# EAGLE board piezo-preamp-tickler_V2-RevG-Breakout (EAGLE 8.3.2)
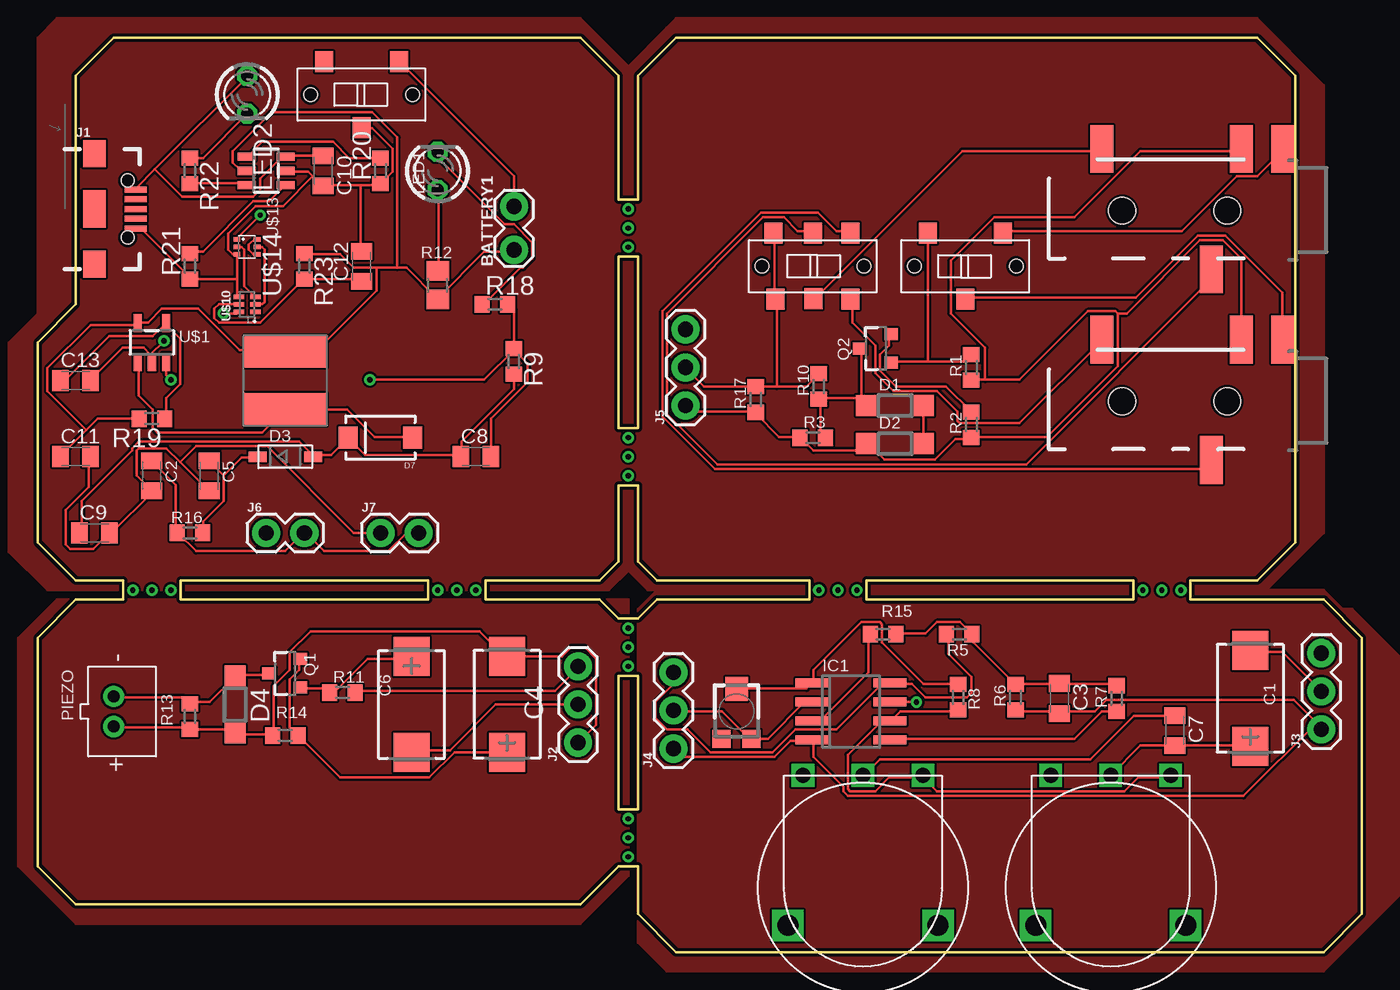
[diagram p0: board, top side]
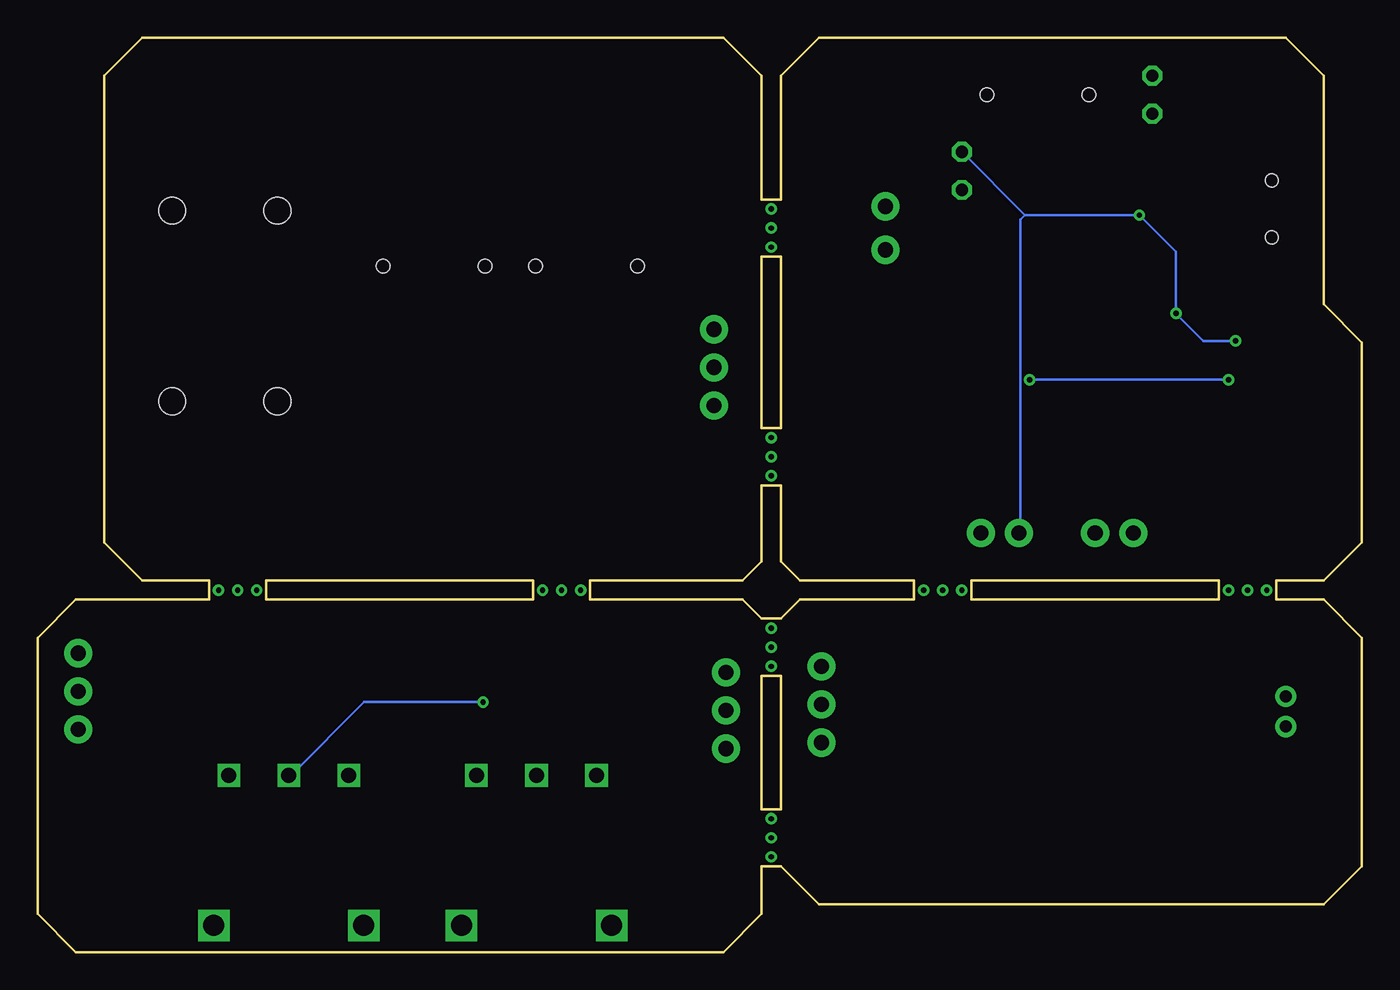
[diagram p1: board, bottom side, seen from below]

Size 88.27 x 60.96 mm. Coordinates in mm from the lower left corner, seen from the top.
Outline: 2.54,43.18 0,40.64 0,27.31 2.54,24.77 5.72,24.77 5.72,23.5 2.54,23.5 0,20.96 0,5.72 2.54,3.18 36.2,3.18 38.73,5.72 40.01,5.72 40.01,2.54 42.55,0 85.73,0 88.27,2.54 88.27,20.96 85.73,23.5 76.84,23.5 76.84,24.77 81.28,24.77 83.82,27.31 83.82,58.42 81.28,60.96 42.55,60.96 40.01,58.42 40.01,50.16 38.73,50.16 38.73,58.42 36.2,60.96 5.08,60.96 2.54,58.42 2.54,43.18
Outline: 55.25,24.77 55.25,23.5 73.03,23.5 73.03,24.77 55.25,24.77
Outline: 9.53,24.77 9.53,23.5 26.04,23.5 26.04,24.77 9.53,24.77
Outline: 29.85,24.77 29.85,23.5 37.47,23.5 38.73,22.23 40.01,22.23 41.28,23.5 51.44,23.5 51.44,24.77 41.28,24.77 40.01,26.04 40.01,31.12 38.73,31.12 38.73,26.04 37.47,24.77 29.85,24.77
Outline: 38.73,46.36 40.01,46.36 40.01,34.93 38.73,34.93 38.73,46.36
Outline: 38.73,18.42 40.01,18.42 40.01,9.52 38.73,9.52 38.73,18.42
Copper layers (1*16): Top 0.035mm / dielectric 1.5mm / Bottom 0.035mm
Design rules "default *": minimum track width 6mil, minimum drill 0.35mm, track to track 6mil, track to pad 10mil, pad to pad 6mil, via to via 6mil, smd to smd 6mil, copper to edge 8mil, drill to drill 6mil, minimum pad ring 10mil, minimum via ring 8mil, stop-mask expansion 4mil, vias tented up to drill 20mil, thermal gap 10mil

## Footprints (pad centres in the part's own frame; a part is rotated, then mirrored left to right if it is on the bottom)
1X02_LOCK = drill 1.016 pad 1.88: 1 -0.178,0; 2 2.718,0
CT7343 = smd 2.6 x 2.4: + 3.2,0; - -3.2,0
C0805K = smd 1.1 x 1.4: 1 -1,0; 2 1,0
SOD123 = smd 1.4 x 1.4: A 1.9,0; C -1.9,0
SOD-123 = smd 1.2 x 0.7: A 1.85,0; C -1.85,0
SMA-DIODE = smd 1.27 x 1.47: A -2.15,0; C 2.15,0
SO08 = smd 0.6 x 2.2: 1 -1.905,-2.6; 2 -0.635,-2.6; 3 0.635,-2.6; 4 1.905,-2.6; 5 1.905,2.6; 6 0.635,2.6; 7 -0.635,2.6; 8 -1.905,2.6
USB-B-MICRO-SMD_RED_PASTE = smd 1.45 x 0.4: D+ 2.725,0; D- 2.725,0.65; GND 2.725,-1.3; ID 2.725,-0.65; VBUS 2.725,1.3 | smd 1.5 x 1.8: SHIELD1 0,3.685; SHIELD2 0,-3.685 | smd 1.5 x 2.5: SHIELD3 0,0 | hole 0.85: 2.2,1.9; 2.2,-1.9
1X03 = drill 1.016 pad 1.88: 1 0,0; 2 2.54,0; 3 5.08,0
1X02 = drill 1.016 pad 1.88: 1 0,0; 2 2.54,0
CR54 = smd 5.5 x 2.15: P$1 0,1.92; P$2 0,-1.92
LED3MM = drill 0.813 octagon: A -1.27,0; K 1.27,0
JST-PH-2-THM = drill 0.8 pad 1.422: 1 1,0; 2 -1,0
SWITCH_SPDT_CL-SB-12B = smd 1.2 x 1.4: P$1 -2.5,-2.2; P$2 0,2.2; P$3 2.5,-2.2 | hole 0.9: -3.4,0; 3.4,0
SOT23-3 = smd 0.8 x 0.9: 1 -0.95,-1; 2 0.95,-1; 3 0,1.1
R0603 = smd 1 x 1.1: 1 -0.85,0; 2 0.85,0
TC33X = smd 1.2 x 1.2: 1 -1,-1.825; 3 1,-1.825 | smd 1.5 x 1.6: 2 0,1.5
R0805 = smd 1.3 x 1.5: 1 -0.95,0; 2 0.95,0
AUDIO-JACK-TRRS-SMD = smd 1.524 x 3.175: EARTH -2.114,-5.271; RING1 2.644,2.759; RING2 0.66,-5.271; TIP 9.948,-5.271 | hole 1.778: 1.6,-1.15; 8.6,-1.15
SOT23-5 = smd 0.55 x 1.2: 1 -0.95,-1.3; 2 0,-1.3; 3 0.95,-1.3; 4 0.95,1.3; 5 -0.95,1.3
SWITCH_DPDT_CL-SB-22B = smd 1.2 x 1.4: 1 -2.5,-2.2; 2 0.05,-2.17; 3 2.5,-2.2; 4 -2.63,2.2; 5 0,2.2; 6 2.51,2.2 | hole 0.9: -3.4,0; 3.4,0
THUMBPOT14 = drill 1 square: P$1 -4,-7.5; P$2 0,-7.5; P$3 4,-7.5 | drill 1.4 square: P$4 -5,2.5; P$5 5,2.5
WSON-6 = smd 0.3 x 0.7: 1 -0.5,-0.55; 2 0,-0.55; 3 0.5,-0.55; 4 0.5,0.55; 5 0,0.55; 6 -0.5,0.55
SOT23-6 = smd 0.55 x 1.2: 1 -0.95,-1.3; 2 0,-1.3; 3 0.95,-1.3; 4 0.95,1.3; 5 0,1.3; 6 -0.95,1.3
SOT-563 = smd 0.3 x 0.45: 1 -0.5,-0.675; 2 0,-0.675; 3 0.5,-0.675; 4 0.5,0.675; 5 0,0.675; 6 -0.5,0.675

## Placement (x,y rotation side)
BATTERY1  [1X02_LOCK]  31.75,46.99 90 top
C1  47uF  [CT7343]  80.81,16.91 270 top
C2  0.1uF  [C0805K]  7.62,31.75 270 top
C3  10uF  [C0805K]  68.11,16.91 270 top
C4  150uF  [CT7343]  31.28,16.51 270 top
C5  10uF  [C0805K]  11.43,31.75 270 top
C6  3.3uF  [CT7343]  24.93,16.51 90 top
C7  10uF  [C0805K]  75.8,14.77 270 top
C8  22pF  [C0805K]  29.21,33.02 0 top
C9  10uF  [C0805K]  3.81,27.94 0 top
C10  10uF  [C0805K]  19.05,52.07 270 top
C11  10uF  [C0805K]  2.54,33.02 0 top
C12  0.1uF  [C0805K]  21.59,45.72 90 top
C13  0.1uF  [C0805K]  2.54,38.1 0 top
D1  [SOD123]  57.15,36.43 0 top
D2  [SOD123]  57.15,33.89 0 top
D3  1N4148  [SOD-123]  16.51,33.02 0 top
D4  [SOD123]  13.17,16.51 270 top
D7  10BQ015  [SMA-DIODE]  22.86,34.29 180 top
IC1  OPA2134UA  [SO08]  54.21,16.04 270 top
J1  [USB-B-MICRO-SMD_RED_PASTE]  3.81,49.53 0 top
J2  [1X03]  36.03,13.97 90 top
J3  [1X03]  85.56,14.84 90 top
J4  [1X03]  42.38,13.57 90 top
J5  [1X03]  43.18,36.43 90 top
J6  [1X02]  15.24,27.94 0 top
J7  [1X02]  22.86,27.94 0 top
L4  2.7uH  [CR54]  16.51,38.1 0 top
LED1  [LED3MM]  26.67,52.07 90 top
LED2  [LED3MM]  13.97,57.15 270 top
PIEZO  [JST-PH-2-THM]  5.08,16.04 270 top
POWER  SPDT  [SWITCH_SPDT_CL-SB-12B]  21.59,57.15 180 top
Q1  J201SOT-23  [SOT23-3]  16.51,18.58 90 top
Q2  J201SOT-23  [SOT23-3]  55.88,40.24 90 top
R1  2.2K  [R0603]  62.23,38.97 90 top
R2  1.2K  [R0603]  62.23,35.16 90 top
R3  1M  [R0603]  51.67,34.29 0 top
R4  20K  [TC33X]  46.59,16.04 0 top
R5  100K  [R0603]  61.43,21.19 180 top
R6  150K  [R0603]  65.17,16.98 90 top
R7  1K  [R0603]  71.92,16.91 90 top
R8  1K  [R0603]  61.36,16.98 270 top
R9  866k  [R0603]  31.75,39.37 270 top
R10  1K  [R0603]  52.07,37.7 90 top
R11  10K  [R0603]  20.32,17.31 0 top
R12  390  [R0805]  26.67,44.45 270 top
R13  10M  [R0603]  10.16,15.71 90 top
R14  1.2K  [R0603]  16.51,14.44 0 top
R15  1K  [R0603]  56.35,21.19 0 top
R16  10  [R0603]  10.16,27.94 0 top
R17  10K  [R0603]  47.86,36.83 90 top
R18  100k  [R0603]  30.48,43.18 0 top
R19  15k  [R0603]  7.62,35.56 180 top
R20  10k  [R0603]  22.86,52.07 90 top
R21  10k  [R0603]  10.16,45.72 90 top
R22  1k  [R0603]  10.16,52.07 270 top
R23  330  [R0603]  17.78,45.72 270 top
SW2-SPST  INPUT-select  [SWITCH_SPDT_CL-SB-12B]  61.83,45.72 180 top
TO-HEADSET  AUDIO-JACK3LGPADS  [AUDIO-JACK-TRRS-SMD]  80.88,48.26 180 top
TO-PHONE  AUDIO-JACK3LGPADS  [AUDIO-JACK-TRRS-SMD]  80.88,35.56 180 top
U$1  SC4503  [SOT23-5]  7.62,40.64 0 top
U$2  SWITCH_DPDT  [SWITCH_DPDT_CL-SB-22B]  51.67,45.72 0 top
U$4  [THUMBPOT14]  71.52,4.28 180 top
U$5  [THUMBPOT14]  55.01,4.28 180 top
U$10  BQ297X-BATTERY-MANAGER  [WSON-6]  13.97,43.18 90 top
U$13  BQ21040-LIPO-CHARGER  [SOT23-6]  15.24,52.07 270 top
U$14  DUAL-NFET-DMN2400  [SOT-563]  13.97,46.99 270 top

## Library data of the parts
BATTERY1 J2-J7 = SparkFun-Connectors
C1-C13 PIEZO R4 = adafruit
D1 D2 D4 = diode
D3 = adafruit; DIGIKEY: 1N4148WTPMSCT-ND
D7 L4 = SparkFun
IC1 = linear
J1 = SparkFun-Connectors; PROD_ID: CONN-11752
LED1 LED2 = led
POWER Q1 Q2 R1-R3 R5-R23 SW2-SPST U$1 U$2 U$4 U$5 U$10 U$13 U$14 = CMU-ArtFab
TO-HEADSET TO-PHONE = Daniel

## Nets
+12V: C8.1 C9.1 D3.A D7.C R9.2
GND: C2.2 C5.2 C9.2 C11.2 C13.2 J7.1 LED1.K R18.1 U$1.2 U$10.6 U$14.1
GND1: C10.2 C12.2 J1.GND POWER.P$2 R20.1 R21.1 U$10.4 U$13.5 U$14.3
N$1: D1.A D2.A
N$2: D4.C PIEZO.2 Q1.3 R13.2
N$3: Q2.2 R2.2
N$5: IC1.5 R7.1
N$6: C1.+ C7.2 IC1.7 U$4.P$2
N$7: IC1.6 R8.2 U$4.P$1 U$5.P$1
N$9: C6.+ Q1.1 R11.1
N$10: D1.C Q2.3 R3.2 R10.1
N$11: J5.2 R10.2 R17.2 U$2.1 U$2.4
N$12: SW2-SPST.P$1 TO-HEADSET.EARTH
N$13: TO-HEADSET.TIP U$2.2
N$14: C4.+ Q1.2 R14.2
N$15: TO-HEADSET.RING1 U$2.5
N$16: C5.1 D3.C R16.2
N$17: SW2-SPST.P$2 TO-PHONE.EARTH
N$18: LED1.A R12.1
N$19: IC1.2 J4.2 R4.3
N$21: BATTERY1.2 POWER.P$1
N$22: IC1.3 R15.1
N$23: C3.1 R5.1 R6.2 R7.2 R15.2
N$24: IC1.1 R4.2 R8.1
N$25: J2.3 R11.2
N$26: TO-PHONE.RING1 U$2.6
N$27: TO-PHONE.TIP U$2.3
N$28: C6.- J2.2
N$29: C13.1 R19.1 U$1.4
N$30: C8.2 R9.1 R18.2 U$1.3
N$31: C7.1 U$5.P$2
N$32: D7.A L4.P$2 U$1.1
N$33: R22.2 U$13.3
N$34: C12.1 R23.2 U$10.5
N$35: R20.2 U$13.1
N$36: C1.- J3.2
N$37: U$14.4 U$14.6
N$38: R21.2 U$13.4
N$39: U$10.2 U$14.5
N$40: LED2.K R22.1
N$41: U$10.3 U$14.2
N$42: IC1.8 J4.3 R5.2
N$43: C2.1 J6.2 J7.2 R16.1
N$44: C4.- D4.A J2.1 PIEZO.1 R13.1 R14.1
N$45: D2.C J5.1 R1.1 R2.1 R3.1 R17.1 TO-HEADSET.RING2 TO-PHONE.RING2
N$47: C3.2 IC1.4 J3.1 J4.1 R6.1
SELECT: Q2.1 R1.2 SW2-SPST.P$3
V+: C10.1 J1.VBUS LED2.A U$13.6
VBAT: BATTERY1.1 C11.1 L4.P$1 R12.2 R19.2 R23.1 U$1.5 U$13.2

## Tracks (layer width: path | path; a pad name or v marks a point on that pad's centre or on a via)
+12V
  Top 0.152: R9.2 31.75,37.54 28.25,34.04 28.25,33.12 C8.1 28.09,33.12 21.84,33.12 20.78,34.19 D7.C 20.62,34.19 19.56,33.12 18.49,33.12 D3.A 18.34,33.12 17.42,34.04 6.76,34.04 6.3,33.58 6.3,33.43 2.95,30.07 2.95,27.94 C9.1
GND  (via drill 0.35)
  Top 0.152: 9.5,32.66 8.59,33.58 6.76,33.58 6.6,33.43 6.6,31.75 7.52,30.84 C2.2 7.67,30.68 4.93,27.94 C9.2 4.78,27.94 3.71,26.87 2.18,26.87 1.88,27.18 1.88,29.46 3.4,30.99 3.4,32.97 C11.2 | 9.5,32.66 11.33,30.84 C5.2 | J7.1 21.08,27.94 15.29,33.73 10.57,33.73 9.5,32.66 | 7.52,39.83 7.52,39.37 U$1.2 7.52,39.83 | 7.52,39.83 7.06,40.28 5.69,40.28 3.56,38.15 C13.2 | v14.83,49.12 13.31,47.6 U$14.1 | v12.4,42.57 13.31,42.57 U$10.6 | R18.1 29.77,43.18 32.21,45.62 32.36,45.62 32.97,46.23 32.97,47.3 31.75,48.51 31.14,48.51 26.72,52.93 26.72,53.24 LED1.K | v8.43,40.74 7.52,39.83
  Bottom 0.152: 22.45,49.12 v14.83,49.12 12.4,46.69 v12.4,42.57 10.57,40.74 v8.43,40.74 | LED1.K 22.45,49.12 | 22.45,49.12 22.76,48.82 22.76,27.94 J7.1
GND1
  Top 0.152: 13.31,44.86 13.31,43.79 U$10.4 | 13.31,44.86 13.31,46.38 U$14.3 13.16,46.53 13.01,46.53 12.7,46.84 12.7,47.9 14.53,49.73 16.36,49.73 18.34,51.71 | 13.31,44.86 10.26,44.86 R21.1 10.11,45.01 6.91,48.21 6.6,48.21 J1.GND | 21.54,51.11 19.1,51.11 C10.2 18.95,51.11 18.34,51.71 | 21.54,51.11 22.76,51.11 R20.1 22.91,51.26 23.67,52.02 23.67,53.54 22.3,54.91 21.69,54.91 POWER.P$2 | 18.34,51.71 18.03,52.02 16.66,52.02 U$13.5 | 21.54,51.11 21.54,46.84 C12.2
N$1
  Top 0.152: D2.A 59.03,34.04 59.03,36.32 D1.A
N$2
  Top 0.152: Q1.3 15.29,18.49 13.31,18.49 D4.C 13.16,18.34 11.48,16.66 10.26,16.66 R13.2 10.11,16.66 9.8,16.97 5.08,16.97 PIEZO.2
N$3
  Top 0.152: Q2.2 56.74,41.05 56.74,40.44 56.13,39.83 56.13,38.76 57.2,37.69 60.55,37.69 R2.2
N$4
  pour Top: 0,60.96 0,42.55 -1.9,40.64 -1.9,26.67 0.64,24.13 38.1,24.13 39.37,25.4 39.37,59.05 36.2,62.23 1.91,62.23 1.27,62.23
N$5
  Top 0.152: R7.1 71.83,16.05 70.92,16.05 69.09,14.22 56.9,14.22 IC1.5
N$6  (via drill 0.35)
  Top 0.152: C1.+ 80.67,13.77 75.95,13.77 C7.2 73.51,13.77 U$4.P$2 | v58.57,16.66 56.9,16.66 IC1.7
  Bottom 0.152: v58.57,16.66 66.5,16.66 71.37,11.79 U$4.P$2
N$7
  Top 0.152: R8.2 61.32,16.05 57.51,16.05 56.9,15.44 IC1.6 56.74,15.29 56.13,15.29 54,13.16 54,10.87 54.15,10.72 55.83,10.72 56.74,11.63 58.88,11.63 U$5.P$1 59.03,11.63 59.94,10.72 72.44,10.72 73.36,11.63 75.49,11.63 U$4.P$1
N$8
  pour Top: 41.91,61.59 39.37,59.05 39.37,25.4 40.64,24.13 81.92,24.13 85.73,27.94 85.73,57.79 81.28,62.23 42.55,62.23
N$9
  Top 0.152: Q1.1 17.58,17.58 19.25,17.58 19.41,17.42 R11.1 19.56,17.42 19.86,17.42 22,19.56 24.89,19.56 C6.+
N$10
  Top 0.152: R3.2 52.48,34.34 52.17,34.65 52.17,36.78 R10.1 52.17,36.93 54.92,36.93 | 54.92,36.93 54.92,36.78 55.22,36.47 D1.C 54.92,36.93 | 54.92,36.93 54.92,40.13 Q2.3
N$11
  Top 0.152: U$2.4 49.12,47.9 49.12,43.64 U$2.1 49.28,43.48 49.28,37.69 | 49.28,37.69 51.26,37.69 52.02,38.46 R10.2 | 49.28,37.69 47.9,37.69 R17.2 47.75,37.69 44.4,37.69 43.18,38.91 J5.2
N$12
  Top 0.152: SW2-SPST.P$1 64.36,48.06 76.25,48.06 79.91,51.71 81.28,51.71 82.96,53.39 TO-HEADSET.EARTH
N$13
  Top 0.152: U$2.2 51.87,43.64 61.62,53.39 70.92,53.39 TO-HEADSET.TIP
N$14
  Top 0.152: Q1.2 17.42,19.41 17.42,18.8 16.82,18.19 16.82,14.99 17.27,14.53 R14.2 17.42,14.38 20.17,11.63 26.11,11.63 27.79,13.31 31.14,13.31 C4.+
N$15
  Top 0.152: U$2.5 51.56,48.06 50.65,48.06 49.73,48.97 48.36,48.97 41.96,42.57 41.96,35.87 45.31,32.51 65.89,32.51 78.23,44.86 78.23,45.47 TO-HEADSET.RING1
N$16
  Top 0.152: 12.4,31.75 12.4,30.07 11.02,28.7 11.02,27.94 R16.2 | 12.4,31.75 11.48,32.66 C5.1 | 12.4,31.75 13.61,32.97 14.53,32.97 D3.C
N$17
  Top 0.152: SW2-SPST.P$2 61.92,43.64 73.2,43.64 77.32,47.75 79.15,47.75 82.96,43.94 82.96,40.89 TO-PHONE.EARTH
N$18
  Top 0.152: R12.1 26.72,45.47 26.72,50.8 LED1.A
N$19
  Top 0.152: IC1.2 51.56,16.66 51.11,16.66 48.67,14.22 R4.3 47.45,14.22 45.62,16.05 42.42,16.05 J4.2
N$20
  pour Top: 1.27,23.5 -1.27,20.96 -1.27,5.72 2.54,1.91 36.2,1.91 39.37,5.08 39.37,23.5
N$21
  Top 0.152: BATTERY1.2 31.75,51.71 24.13,59.33 POWER.P$1
N$22
  Top 0.152: R15.1 55.37,21.08 55.37,18.64 52.17,15.44 51.71,15.44 IC1.3
N$23
  Top 0.152: R15.2 57.2,21.23 59.18,21.23 59.94,22 61.47,22 62.23,21.23 R5.1 62.38,21.08 62.38,20.63 65.13,17.88 R6.2 65.28,17.88 68.02,17.88 C3.1 68.17,17.88 71.83,17.88 R7.2
N$24
  Top 0.152: R8.1 61.32,17.88 59.03,17.88 56.29,20.63 56.29,21.84 56.13,22 54.92,22 51.71,18.8 51.71,18.03 IC1.1 51.56,17.88 51.26,17.58 46.69,17.58 R4.2
N$25
  Top 0.152: R11.2 21.23,17.42 34.49,17.42 36.02,18.95 J2.3
N$26
  Top 0.152: U$2.6 54.15,48.06 53.24,48.06 52.02,49.28 48.21,49.28 41.66,42.72 41.66,35.71 45.16,32.21 77.78,32.21 78.23,32.66 TO-PHONE.RING1
N$27
  Top 0.152: U$2.3 54.31,43.48 54.31,41.96 55.83,40.44 55.83,38.61 57.05,37.39 59.94,37.39 61.32,36.02 61.32,35.41 61.47,35.26 65.43,35.26 70.92,40.74 TO-PHONE.TIP
N$28
  Top 0.152: J2.2 30.53,16.51 27.48,13.46 25.04,13.46 C6.-
N$29
  Top 0.152: R19.1 8.59,35.56 8.59,36.93 9.5,37.85 9.5,40.89 8.59,41.81 U$1.4 8.43,41.81 7.67,41.05 4.78,41.05 1.88,38.15 1.58,38.15 C13.1
N$30  (via drill 0.35)
  Top 0.152: R18.2 31.45,43.18 31.75,42.88 R9.1 31.75,40.13 | v8.89,38.15 8.59,38.46 8.59,39.22 U$1.3 | v22.15,38.15 29.77,38.15 31.75,40.13 | 31.75,40.13 32.66,39.22 32.66,38 30.23,35.56 30.23,33.12 C8.2
  Bottom 0.152: v22.15,38.15 v8.89,38.15
N$31
  Top 0.152: C7.1 75.79,15.75 73.05,15.75 70.16,12.85 56.13,12.85 55.07,11.79 U$5.P$2
N$32
  Top 0.152: L4.P$2 14.99,34.65 7.98,34.65 7.67,34.95 7.67,36.17 6.76,37.08 6.76,39.22 U$1.1 | L4.P$2 20.62,36.17 22.45,34.34 24.89,34.34 D7.A | L4.P$2
N$33
  Top 0.152: R22.2 10.26,51.26 13.92,51.26 U$13.3
N$34
  Top 0.152: U$10.5 12.09,43.18 11.79,42.88 11.79,42.27 12.09,41.96 14.83,41.96 17.73,44.86 R23.2 17.88,44.86 21.54,44.86 C12.1
N$35
  Top 0.152: R20.2 22.76,52.93 20.78,52.93 19.71,54 14.99,54 14.07,53.09 U$13.1
N$36
  Top 0.152: C1.- 80.82,20.02 82.96,20.02 85.55,17.42 J3.2
N$37
  Top 0.152: U$14.4 14.53,46.53 14.38,46.53 14.07,46.84 14.07,47.14 14.53,47.6 U$14.6
N$38
  Top 0.152: R21.2 10.26,46.69 11.02,46.69 14.38,50.04 15.44,50.04 16.51,51.11 U$13.4
N$39
  Top 0.152: U$14.5 14.99,46.99 15.14,46.84 15.14,43.33 14.99,43.18 U$10.2
N$40
  Top 0.152: LED2.K 11.02,52.93 10.26,52.93 R22.1
N$41
  Top 0.152: U$14.2 13.61,46.99 13.77,46.84 13.77,44.4 14.38,43.79 U$10.3
N$42
  Top 0.152: R5.2 60.71,21.08 60.71,19.86 62.23,18.34 62.23,17.27 61.92,16.97 59.18,16.97 58.27,17.88 56.9,17.88 IC1.8 56.74,17.88 56.29,17.88 53.24,14.83 50.5,14.83 48.97,13.31 44.86,13.31 43.33,14.83 41.96,14.83 41.2,15.6 41.2,16.66 42.27,17.73 42.27,18.64 J4.3
N$43
  Top 0.152: C2.1 7.67,32.66 9.2,31.14 9.2,27.94 R16.1 9.35,27.94 10.57,26.72 16.51,26.72 17.73,27.94 J6.2 17.88,27.94 19.1,26.72 23.37,26.72 24.59,27.94 J7.2
N$44
  Top 0.152: PIEZO.1 5.08,14.99 10.11,14.99 R13.1 10.26,14.83 13.01,14.83 13.16,14.68 D4.A 13.31,14.53 15.6,14.53 R14.1 15.75,14.53 15.75,17.73 16.82,18.8 16.82,20.02 18.19,21.39 29.46,21.39 31.14,19.71 C4.- 31.29,19.71 34.95,19.71 35.56,20.32 36.47,20.32 37.24,19.56 37.24,15.14 36.17,14.07 J2.1
N$45
  Top 0.152: J5.1 43.18,36.32 43.48,36.02 47.75,36.02 R17.1 47.9,35.87 49.43,34.34 50.8,34.34 R3.1 50.95,34.19 51.71,33.43 54.76,33.43 55.22,33.88 D2.C 55.37,33.88 56.44,32.82 59.79,32.82 61.16,34.19 62.23,34.19 R2.1 62.23,34.34 67.26,34.34 71.98,39.07 71.98,42.57 | 63.14,38.15 65.43,38.15 70,42.72 71.83,42.72 71.98,42.57 | 63.14,38.15 62.23,38.15 R1.1 | 71.98,42.57 72.59,42.57 77.47,47.45 78.99,47.45 80.21,46.23 80.21,40.89 TO-PHONE.RING2 | 63.14,38.15 63.14,40.28 60.86,42.57 60.86,46.08 63.75,48.97 69.09,48.97 73.51,53.39 80.21,53.39 TO-HEADSET.RING2
N$46
  pour Top: 87.63,22.86 87,22.86 85.73,24.13 41.28,24.13 40.01,22.86 40.01,0.64 41.91,-1.27 85.73,-1.27 90.81,3.81 90.81,19.69
N$47
  Top 0.152: J4.1 42.42,13.46 42.88,13.01 49.12,13.01 50.19,14.07 51.56,14.07 IC1.4 51.71,14.07 51.71,13.01 53.7,11.02 53.7,10.72 54,10.41 80.37,10.41 85.24,15.29 | R6.1 65.28,16.05 68.02,16.05 C3.2 68.17,16.05 70.46,16.05 71.22,16.82 83.72,16.82 85.24,15.29 | 85.24,15.29 85.55,14.99 J3.1 85.24,15.29
N$49  (via drill 0.35)
  other vias: 6.35,24.13
N$50  (via drill 0.35)
  other vias: 7.62,24.13
N$51  (via drill 0.35)
  other vias: 8.89,24.13
N$65  (via drill 0.35)
  other vias: 26.67,24.13
N$66  (via drill 0.35)
  other vias: 27.94,24.13
N$67  (via drill 0.35)
  other vias: 29.21,24.13
N$85  (via drill 0.35)
  other vias: 52.07,24.13
N$86  (via drill 0.35)
  other vias: 53.34,24.13
N$87  (via drill 0.35)
  other vias: 54.61,24.13
N$102  (via drill 0.35)
  other vias: 74.93,24.13
N$103  (via drill 0.35)
  other vias: 73.66,24.13
N$104  (via drill 0.35)
  other vias: 76.2,24.13
N$115  (via drill 0.35)
  other vias: 39.37,6.35
N$116  (via drill 0.35)
  other vias: 39.37,7.62
N$117  (via drill 0.35)
  other vias: 39.37,8.89
N$125  (via drill 0.35)
  other vias: 39.37,19.05
N$126  (via drill 0.35)
  other vias: 39.37,20.32
N$127  (via drill 0.35)
  other vias: 39.37,21.59
N$135  (via drill 0.35)
  other vias: 39.37,31.75
N$136  (via drill 0.35)
  other vias: 39.37,33.02
N$137  (via drill 0.35)
  other vias: 39.37,34.29
N$147  (via drill 0.35)
  other vias: 39.37,46.99
N$148  (via drill 0.35)
  other vias: 39.37,48.26
N$149  (via drill 0.35)
  other vias: 39.37,49.53
SELECT
  Top 0.152: 59.33,39.37 61.92,39.37 62.23,39.68 R1.2 | 59.33,39.37 56.9,39.37 Q2.1 | 59.33,39.37 59.33,47.9 SW2-SPST.P$3
V+
  Top 0.152: C10.1 18.95,53.09 16.66,53.09 U$13.6 16.51,52.93 16.21,52.93 14.83,51.56 14.83,50.8 14.38,50.34 9.65,50.34 7.82,52.17 | 7.82,52.17 14.07,58.42 LED2.A | 7.82,52.17 6.6,50.95 J1.VBUS
VBAT
  Top 0.152: R19.2 4.01,35.56 3.25,34.8 | 3.25,34.8 1.58,33.12 C11.1 | 16.51,40.13 13.46,40.13 10.72,42.88 8.28,42.88 7.37,41.96 6.76,41.96 U$1.5 6.6,41.81 3.56,41.81 0.66,38.91 0.66,37.39 3.25,34.8 | 23.98,45.62 24.59,45.62 26.57,43.64 R12.2 26.72,43.64 29.77,46.69 31.75,46.69 BATTERY1.1 | 23.98,45.62 22.61,45.62 | 22.61,45.62 21.08,45.62 20.17,46.53 17.88,46.53 R23.1 | 23.98,45.62 23.98,54.3 22.3,55.98 15.6,55.98 13.01,53.39 13.01,52.63 13.46,52.17 13.92,52.17 U$13.2 | 16.51,40.13 18.64,40.13 22.61,44.09 22.61,45.62 | 16.51,40.13 L4.P$1